# Altium PCB PIC16F877A_LM35_LCD.pcbdoc
Units mm, origin at the board's own origin, x right, y up, seen from the top; angles counter-clockwise.
Board outline 119.91 x 90.74 mm, 2 copper layers (Top Layer, Bottom Layer); 24 components, 53 nets, 137 pads, 0 vias.
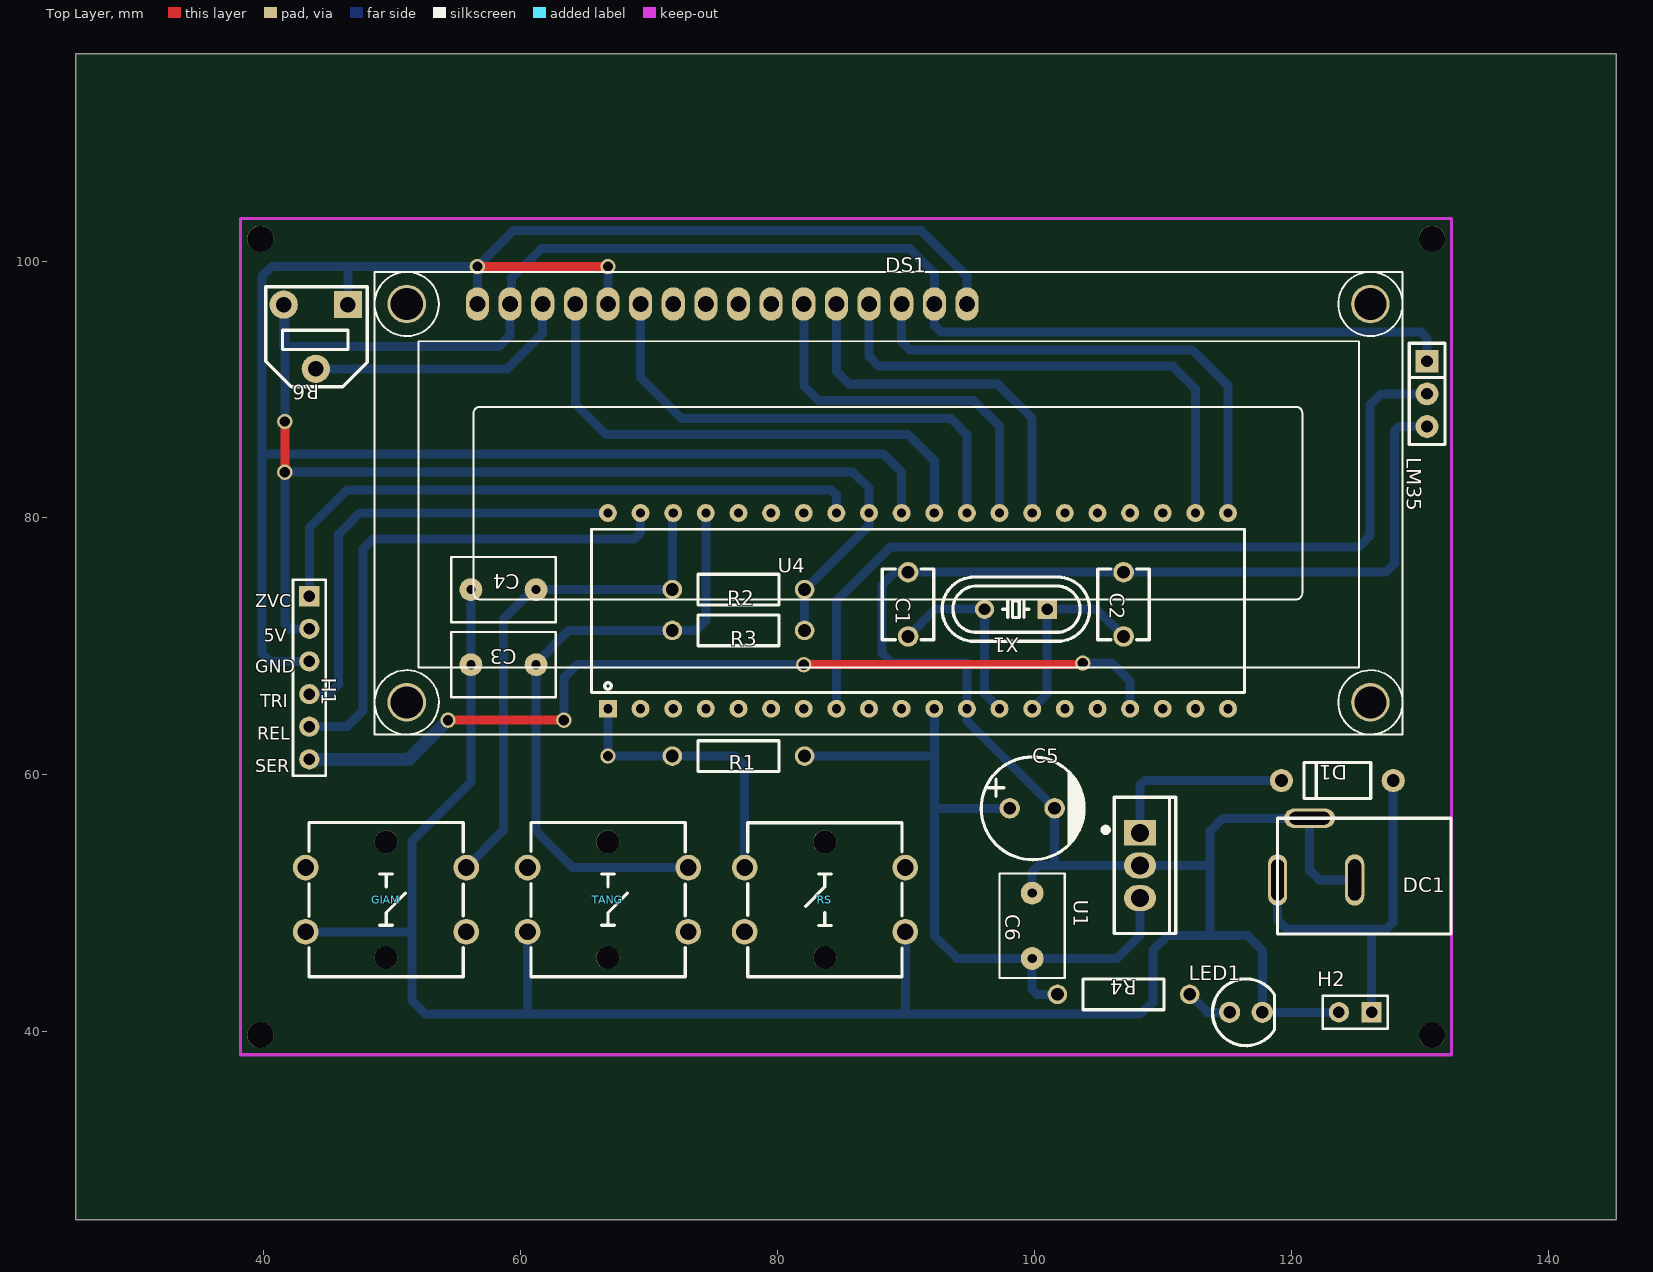
[diagram p0: Top Layer view]
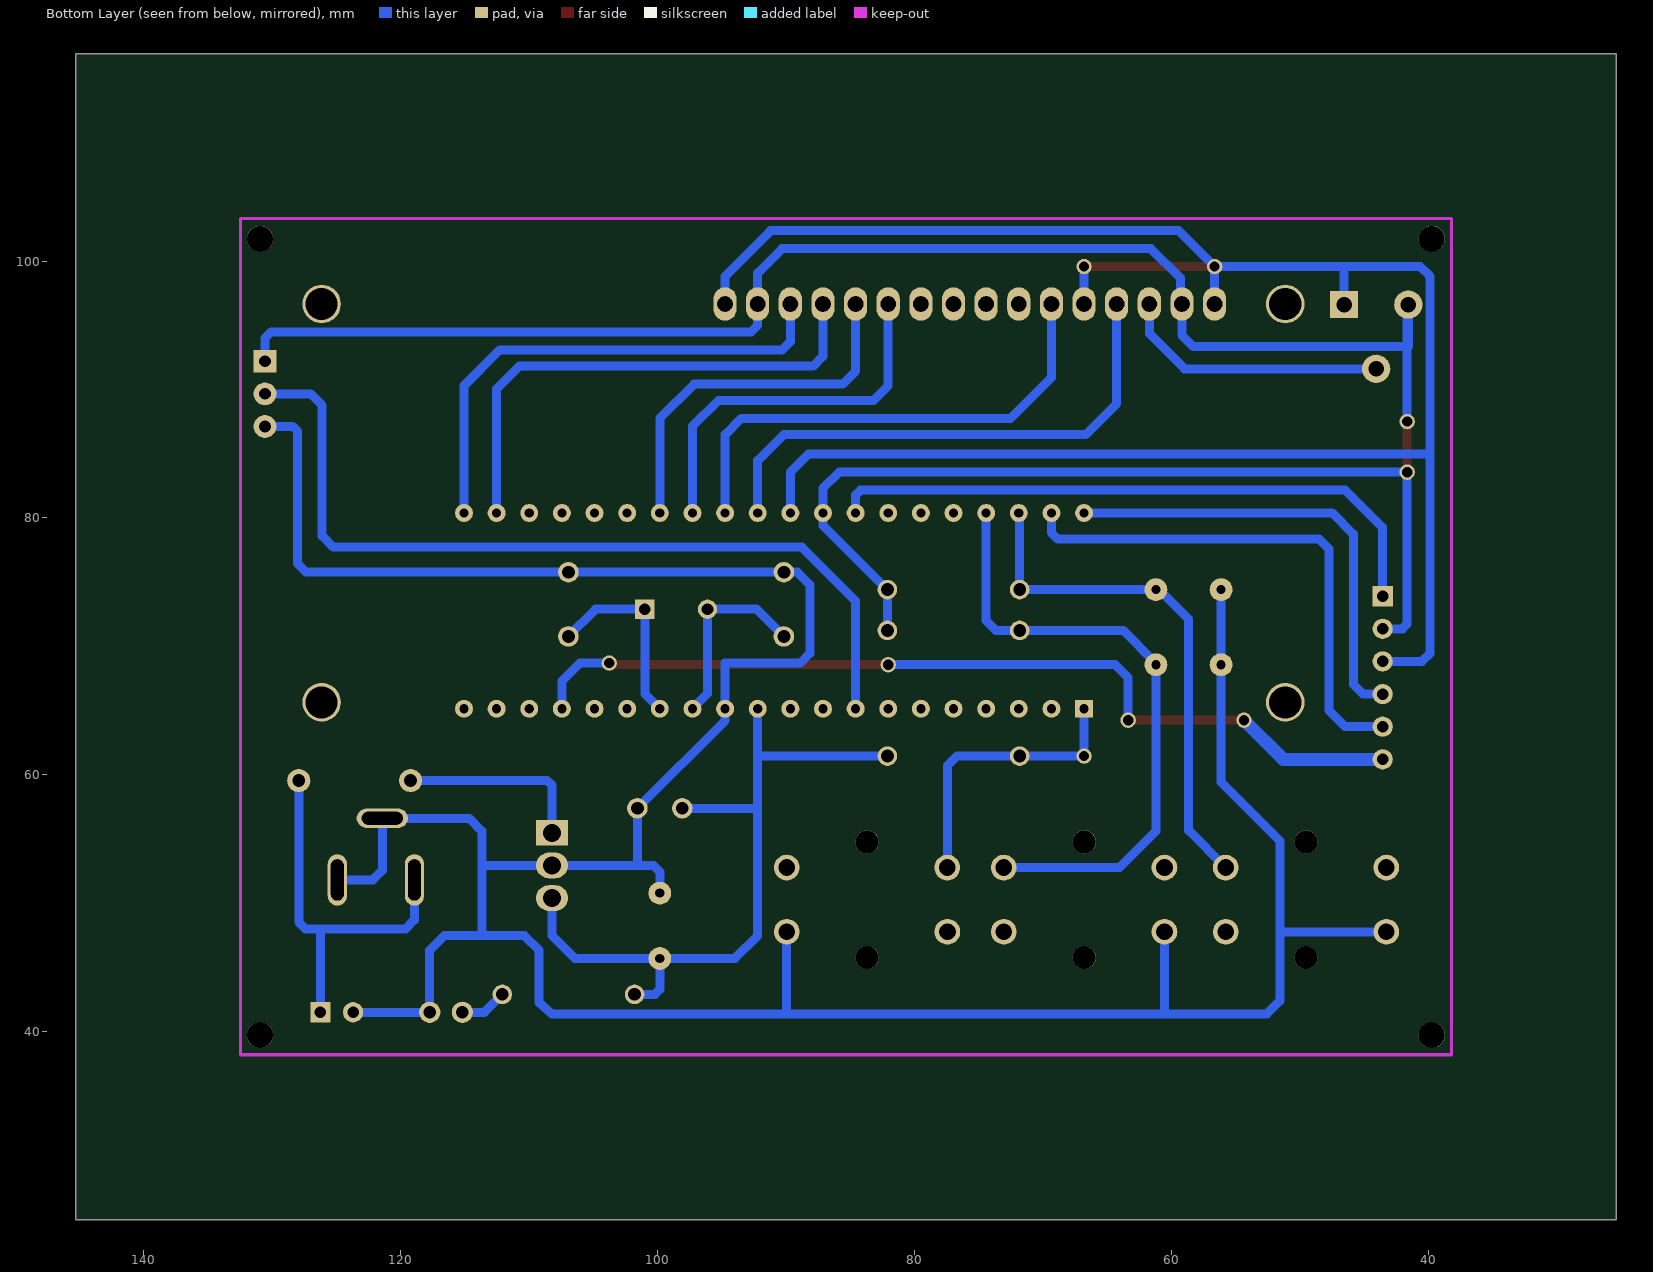
[diagram p1: Bottom Layer view, seen from below]

## Layer stack, top to bottom
Top Layer: signal copper (thickness not stored)
Dielectric: dielectric 0.32, FR-4, Dk 4.8
Bottom Layer: signal copper (thickness not stored)

## Board outline
145.313,25.4 25.4,25.4 25.4,116.139 145.313,116.139

## Components (designator, comment, footprint, x,y, rotation, side; value= is the part's Value field where it differs from the comment)
C1 "33pF/1kV" CAP-TH_L5.0-W4.0-P5.00-D1.0-FD 90.195,73.279 r270 top
C2 "33pF/1kV" CAP-TH_L5.0-W4.0-P5.00-D1.0-FD 106.959,73.279 r270 top
C3 "100nF" RAD-0.2 58.699,68.58 r180 top
C4 "100nF" RAD-0.2 58.699,74.422 r180 top
C5 "220uF" CAP-TH_BD8.0-P3.50-D1.0-FD 99.847,57.404 r0 top
C6 "100nF" RAD-0.2 99.847,48.26 r270 top
D1 "1N4004" DO-41_BD2.4-L4.7-P8.70-D0.9-FD 123.596,59.563 r180 top
DC1 "DC005" DC-IN-TH_DC-005 121.945,54.229 r180 top
DS1 "LCD16X2" WC1602A 88.671,81.153 r0 top
GIAM "B3F-4055" KEY-TH_4P-L12.0-W12.0-P5.00-LS13.4-EH 49.555,50.292 r0 top
H1 "Header-Male-2.54_1x06" HDR-TH_06P-P2.54-V 43.586,67.564 r270 top
H2 "Header-Male-2.54_1x02" HDR-TH_02P-P2.54-V 124.993,41.529 r180 top
LED1 "LED-5mm/2.54" LED-5MM/2.54 116.484,41.529 r90 top
LM35 "HEADER 3P" "HEADER 3P 2.54MM" 130.581,87.122 r0 top
R1 "1K" RES-TH_BD2.4-L6.3-P10.30-D0.6 76.987,61.468 r0 top
R2 "10k" RES-TH_BD2.4-L6.3-P10.30-D0.6 76.987,74.422 r0 top
R3 "10k" RES-TH_BD2.4-L6.3-P10.30-D0.6 76.987,71.247 r0 top
R4 "330" RES-TH_BD2.4-L6.3-P10.30-D0.6 106.959,42.926 r180 top
R6 "2M" RES-ADJ-SMD_RM065-V1 44.094,94.107 r180 top
RS "B3F-4055" KEY-TH_4P-L12.0-W12.0-P5.00-LS13.4-EH 83.718,50.292 r180 top
TANG "B3F-4055" KEY-TH_4P-L12.0-W12.0-P5.00-LS13.4-EH 66.827,50.292 r0 top
U1 "7805" TO-220-3_L10.0-W4.5-P2.54-L 108.229,52.959 r270 top
U4 "PIC16F877A-IP" DIP40 66.827,65.151 r0 top
X1 "16MHZ" HC-49US_L11.5-W4.5-P4.88 98.577,72.898 r180 top

## Footprints (in the part's own frame and the unit in brackets; to place one, negate y for a bottom-side part, rotate by r counter-clockwise, add the part's x,y. Pads: shape width x height; smd on the part's side, far side on the other; paste and mask are expansions set on the pad)
CAP-TH_BD8.0-P3.50-D1.0-FD [mm]
  round 1.6 hole 1: 1(-1.75,0) 2(1.75,0)
  silkscreen extent -3.96,-4 4.04,4
CAP-TH_L5.0-W4.0-P5.00-D1.0-FD [mm]
  round 1.6 hole 1: 1(-2.499,0) 2(2.499,0)
  silkscreen extent -2.75,-2.01 2.75,1.99
DC-IN-TH_DC-005 [mm]
  oval 4x1.5 hole 1 slot 3.2 at 0 deg: 2(0.5,-2.4)
  oval 1.5x4 hole 1 slot 3.2 at 90 deg: 3(-3,2.4) 4(3,2.4)
  silkscreen extent -10.5,-2.4 3,6.6
DIP40 [mil]
  rect 55x55 hole 28: 1(0,0)
  round 55 hole 28: 2(100,0) 3(200,0) 4(300,0) 5(400,0) 6(500,0) 7(600,0) 8(700,0) 9(800,0) 10(900,0) 11(1000,0) 12(1100,0) 13(1200,0) 14(1300,0) 15(1400,0) 16(1500,0) 17(1600,0) 18(1700,0) 19(1800,0) 20(1900,0) 21(1900,600) 22(1800,600) 23(1700,600) 24(1600,600) 25(1500,600) 26(1400,600) 27(1300,600) 28(1200,600) 29(1100,600) 30(1000,600) 31(900,600) 32(800,600) 33(700,600) 34(600,600) 35(500,600) 36(400,600) 37(300,600) 38(200,600) 39(100,600) 40(0,600)
  silkscreen extent -50,50 1950,550
DO-41_BD2.4-L4.7-P8.70-D0.9-FD [mm]
  round 1.8 hole 1: 1(-4.35,0) 2(4.35,0)
  silkscreen extent -2.6,-1.4 2.6,1.4
HC-49US_L11.5-W4.5-P4.88 [mm]
  rect 1.5x1.5 hole 0.9: 1(-2.44,0)
  round 1.5 hole 0.9: 2(2.44,0)
  silkscreen extent -5.74,-2.5 5.74,2.5
HDR-TH_02P-P2.54-V [mil]
  rect 62x62 hole 35: 1(-50,0)
  round 62 hole 35: 2(50,0)
  silkscreen extent -100,-50 100,50
HDR-TH_06P-P2.54-V [mil]
  rect 62x62 hole 35: 1(-250,0)
  round 62 hole 35: 2(-150,0) 3(-50,0) 4(50,0) 5(150,0) 6(250,0)
  silkscreen extent -300,-50 300,50
"HEADER 3P 2.54MM" [mil]
  rect 70x70 hole 36: 1(0,200)
  round 70 hole 36: 2(0,100) 3(0,0)
  silkscreen extent -55,-55 55,255
KEY-TH_4P-L12.0-W12.0-P5.00-LS13.4-EH [mm]
  round 2 hole 1.3: 1(-6.253,-2.499) 2(6.246,-2.497) 3(6.253,2.497) 4(-6.253,2.499)
  round 1.8 hole 1.8 unplated: ""(0,-4.5) ""(0,4.5)
  silkscreen extent -5.99,-6 6.01,6
LED-5MM/2.54 [mil]
  round 65 hole 38: 1(0,50) 2(0,-50)
  silkscreen extent -102,-88 102,102
RAD-0.2 [mil]
  round 70 hole 28: 1(100,0) 2(-100,0)
  silkscreen extent -160,-100 160,100
RES-ADJ-SMD_RM065-V1 [mm]
  rect 2.2x2.1 hole 1.199: 1(-2.499,-2.5)
  round 2.2 hole 1.199: 2(0,2.5) 3(2.499,-2.499)
  silkscreen extent -4,-3.9 3.9,3.9
RES-TH_BD2.4-L6.3-P10.30-D0.6 [mm]
  round 1.524 hole 1: 1(-5.15,0) 2(5.15,0)
  silkscreen extent -3.15,-1.2 3.15,1.2
TO-220-3_L10.0-W4.5-P2.54-L [mm]
  rect 2x2.5 hole 1.4: 1(-2.54,0)
  oval 2x2.5 hole 1.4: 2(0,0) 3(2.54,0)
  silkscreen extent -5.3,-2.86 5.3,2.8
WC1602A [mm]
  round 3 hole 2.5: 0(-37.499,-15.5) 0(-37.499,15.5) 0(37.499,-15.5) 0(37.499,15.5)
  oval 1.8x2.6 hole 1.2 slot 1.205 at 90 deg: 1(-32,15.5) 2(-29.46,15.5) 3(-26.92,15.5) 4(-24.38,15.5) 5(-21.84,15.5) 6(-19.3,15.5) 7(-16.76,15.5) 8(-14.22,15.5) 9(-11.68,15.5) 10(-9.14,15.5) 11(-6.6,15.5) 12(-4.06,15.5) 13(-1.52,15.5) 14(1.02,15.5) 15(3.56,15.5) 16(6.1,15.5)
  silkscreen extent -40,-18 40,18

## Free pads (board coordinates)
  round 1.199 hole 0.798: GND(66.827,99.568) P$1(41.681,83.566) P$1(41.681,87.503) P$1(54.381,64.262) P$1(56.667,99.568) P$1(63.398,64.262) P$1(66.827,61.468) P$1(82.067,68.58) P$1(103.784,68.707)
  round 2.032 hole 2.032 unplated: ""(39.776,39.751) ""(39.776,101.727) ""(130.962,39.751) ""(130.962,101.727)

## Nets (pads, with @x,y where several pads share a name; then routed paths per layer and width w, separated by ;. In a path a pad name is that pad's centre, name@x,y a point inside that pad or via, vN(x,y) a via of type N, cw(c..) or ccw(c..) an arc to the next point about the centre after c; other vN are vias at no path point)
5V: C5.1 C6.1 DS1.2 DS1.15 H1.2 LM35.1 pad.P$1@41.681,83.566 pad.P$1@41.681,87.503 R1.2 R2.2 R3.2 R4.2 R6.3 U1.3 U4.11 U4.32 | length 261.1
  Top Layer w0.7: pad.P$1@41.681,83.566 pad.P$1@41.681,87.503
  Bottom Layer w0.7: pad.P$1@41.681,87.503 41.681,96.606 R6.3 41.595,93.345 58.318,93.345 59.212,94.237 DS1.2 ; H1.2 42.062,71.374 41.681,71.755 41.681,83.566 85.877,83.566 87.147,82.296 U4.32 87.147,79.432 R2.2 R3.2 ; DS1.2@59.339,96.525 59.339,98.682 61.623,100.965 90.322,100.965 92.232,99.055 DS1.15 92.232,94.991 92.735,94.488 130.073,94.488 130.581,93.98 LM35.1 ; R1.2 92.227,61.468 U4.11 ; C5.1 92.227,57.404 U4.11 ; R4.2 100.228,42.926 99.847,43.307 C6.1 ; U1.3 108.229,47.498 106.451,45.72 C6.1 ; U4.11 92.227,47.498 94.005,45.72 C6.1
D1_2: D1.2 U1.1 | length 14.9
  Bottom Layer w0.7: U1.1 108.229,59.182 108.61,59.563 D1.2 ; D1.2@119.218,59.535 D1.2
DC1_4: D1.1 DC1.4 H2.1 | length 30.1
  Bottom Layer w0.7: DC1.4 118.946,48.72 119.659,48.006 127.406,48.006 127.947,48.547 D1.1 ; H2.1 126.263,48.006
DS1_3: DS1.3 R6.2 | length 21.1
  Bottom Layer w0.7: R6.2 58.993,91.607 61.751,94.365 DS1.3
DS1_7: DS1.7
DS1_8: DS1.8
DS1_9: DS1.9
DS1_10: DS1.10
GIAM_2: GIAM.2
GIAM_4: GIAM.4
GND: C1.1 C2.1 C3.1 C4.1 C5.2 C6.2 DC1.2 DC1.3 DS1.1 DS1.5 DS1.16 GIAM.1 H1.3 H2.2 LED1.2 LM35.3 pad.GND pad.P$1@56.667,99.568 R6.1 RS.4 TANG.1 U1.2 U4.12 U4.31 | length 468.9
  Top Layer w0.7: pad.P$1@56.667,99.568 pad.GND
  Bottom Layer w0.7: 39.903,96.139 39.903,69.469 40.538,68.834 H1.3 ; R6.1 46.594,99.568 pad.P$1@56.667,99.568 ; C4.1 C3.1 56.159,59.436 51.587,54.864 51.587,47.793 ; DS1.1 56.667,96.657 pad.P$1@56.667,99.568 ; pad.GND 66.832,99.568 DS1.5 ; U4.31 89.687,83.566 88.29,84.963 39.903,84.963 39.903,98.806 40.665,99.568 pad.P$1@56.667,99.568 ; 89.941,41.402 89.972,41.402 RS.4 ; DS1.16 94.772,98.803 91.214,102.362 59.461,102.362 pad.P$1@56.667,99.568 ; C6.2 99.847,52.451 100.355,52.959 U1.2 113.69,52.959 ; 101.73,52.959 101.597,53.092 C5.2 94.767,64.234 U4.12 94.767,68.707 88.925,68.707 88.163,69.469 88.163,74.803 89.139,75.778 C1.1 C2.1 127.366,75.778 ; 103.276,41.402 108.229,41.402 109.245,42.291 109.245,46.355 110.388,47.498 116.611,47.498 117.754,46.355 LED1.2 121.137,41.529 H2.2 ; 106.807,41.402 60.574,41.402 ; 113.69,47.498 113.69,52.959 ; DC1.2@121.389,56.182 120.802,56.769 121.445,56.769 DC1.2 ; 124.056,51.829 122.186,51.829 121.445,52.57 DC1.2 ; LM35.3 128.422,87.122 128.041,86.741 128.041,76.454 ; 51.587,47.793 GIAM.1 51.587,47.793 ; 51.587,47.793 51.587,42.418 52.603,41.402 60.574,41.402 ; 60.574,41.402 TANG.1 60.574,41.402 ; 113.69,52.959 113.69,55.626 114.693,56.629 DC1.2 ; 127.366,75.778 128.041,76.454 ; 127.366,75.778 128.041,76.454
LED1_1: LED1.1 R4.1 | length 3.7
  Bottom Layer w0.7: R4.1 113.506,41.529 LED1.1
MCLR: pad.P$1@66.827,61.468 R1.1 RS.2 U4.1 | length 22.6
  Bottom Layer w0.7: U4.1 66.827,61.468 R1.1 ; R1.1 76.733,61.468 77.473,60.729 RS.2
OSC1: C1.2 U4.13 X1.2 | length 15.1
  Bottom Layer w0.7: C1.2 92.314,72.898 X1.2 96.137,66.321 U4.13
OSC2: C2.2 U4.14 X1.1 | length 15.1
  Bottom Layer w0.7: U4.14 101.017,66.321 X1.1 104.841,72.898 C2.2
RA0: U4.2
RA1: U4.3
RA2: U4.4
RA3: U4.5
RA4: U4.6
RA5: U4.7
RB0: H1.1 U4.33 | length 49.1
  Bottom Layer w0.7: H1.1 43.586,79.248 46.507,82.169 84.226,82.169 84.607,81.788 U4.33
RB1: U4.34
RB2: U4.35
RB3: U4.36
RB4: C3.2 R3.1 TANG.3 U4.37 | length 49.1
  Bottom Layer w0.7: TANG.3 64.077,52.789 61.239,55.626 C3.2 61.239,68.707 63.779,71.247 R3.1 73.685,71.247 74.447,72.009 U4.37
RB5: C4.2 GIAM.3 R2.1 U4.38 | length 40.6
  Bottom Layer w0.7: GIAM.3 58.699,55.679 58.699,72.136 60.985,74.422 C4.2 R2.1 ; R2.1 71.836,77.694 71.836,80.32 U4.38
RB6: H1.5 U4.39 | length 40.9
  Bottom Layer w0.7: H1.5 46.507,63.754 47.777,65.024 47.777,77.597 48.539,78.359 68.859,78.359 69.367,78.867 U4.39
RB7: H1.4 U4.40 | length 35.9
  Bottom Layer w0.7: H1.4 45.11,66.294 45.872,67.056 45.872,78.74 47.523,80.391 U4.40
RC0: U4.15
RC1: U4.16
RC2: H1.6 pad.P$1@54.381,64.262 pad.P$1@63.398,64.262 pad.P$1@82.067,68.58 pad.P$1@103.784,68.707 U4.17 | length 71.7
  Top Layer w0.7: pad.P$1@54.381,64.262 pad.P$1@63.398,64.262 ; pad.P$1@82.067,68.58 103.657,68.58 pad.P$1@103.784,68.707
  Bottom Layer w0.7: pad.P$1@63.398,64.262 63.398,67.564 64.414,68.58 pad.P$1@82.067,68.58 ; pad.P$1@103.784,68.707 106.07,68.707 107.467,67.31 U4.17
  Bottom Layer w1: H1.6 51.333,61.214 pad.P$1@54.381,64.262
RC3: U4.18
RC4: U4.23
RC5: U4.24
RC6: U4.25
RC7: U4.26
RD0: U4.19
RD1: U4.20
RD2: DS1.14 U4.21 | length 39.7
  Bottom Layer w0.7: DS1.14 89.687,93.726 90.322,93.091 112.293,93.091 115.087,90.297 U4.21
RD3: DS1.13 U4.22 | length 40.2
  Bottom Layer w0.7: DS1.13 87.152,92.578 87.909,91.821 110.769,91.821 112.547,90.043 U4.22
RD4: DS1.12 U4.27 | length 29.3
  Bottom Layer w0.7: DS1.12 84.612,91.435 85.623,90.424 97.18,90.424 99.847,87.757 U4.27
RD5: DS1.11 U4.28 | length 29.6
  Bottom Layer w0.7: DS1.11 82.072,90.292 83.21,89.154 95.275,89.154 97.307,87.122 U4.28
RD6: DS1.6 U4.29 | length 39.1
  Bottom Layer w0.7: DS1.6 69.372,90.927 72.542,87.757 93.497,87.757 94.767,86.487 U4.29
RD7: DS1.4 U4.30 | length 41.6
  Bottom Layer w0.7: DS1.4 64.292,88.895 66.7,86.487 90.195,86.487 92.227,84.455 U4.30
RE0: LM35.2 U4.8 | length 67
  Bottom Layer w0.7: U4.8 84.607,73.533 88.798,77.724 125.247,77.724 126.136,78.613 126.136,88.773 127.025,89.662 LM35.2
RE1: U4.9
RE2: U4.10
RS_1: RS.1
RS_3: RS.3
S$37: 
TANG_2: TANG.2
TANG_4: TANG.4
pads on no net: DS1.0 GIAM. RS. TANG.

## Silkscreen, mask and mechanical layers (free items; w line width, h text height)
Top Overlay:
  text "ZVC" at 39.395,73.033 h1
  text "5V" at 40.03,70.366 h1
  text "GND" at 39.395,67.953 h1
  text "TRI" at 39.776,65.286 h1
  text "REL" at 39.522,62.746 h1
  text "SER" at 39.395,60.206 h1